# Altium PCB BlinkPico.PcbDoc
Units mm, origin at the board's own origin, x right, y up, seen from the top; angles counter-clockwise.
Board outline 55.91 x 38.26 mm, 4 copper layers (Top Layer, Int1 (GND), Int2 (PWR), Bottom Layer), stack 1.369 mm thick; 9 components, 23 nets, 82 pads, 6 vias.
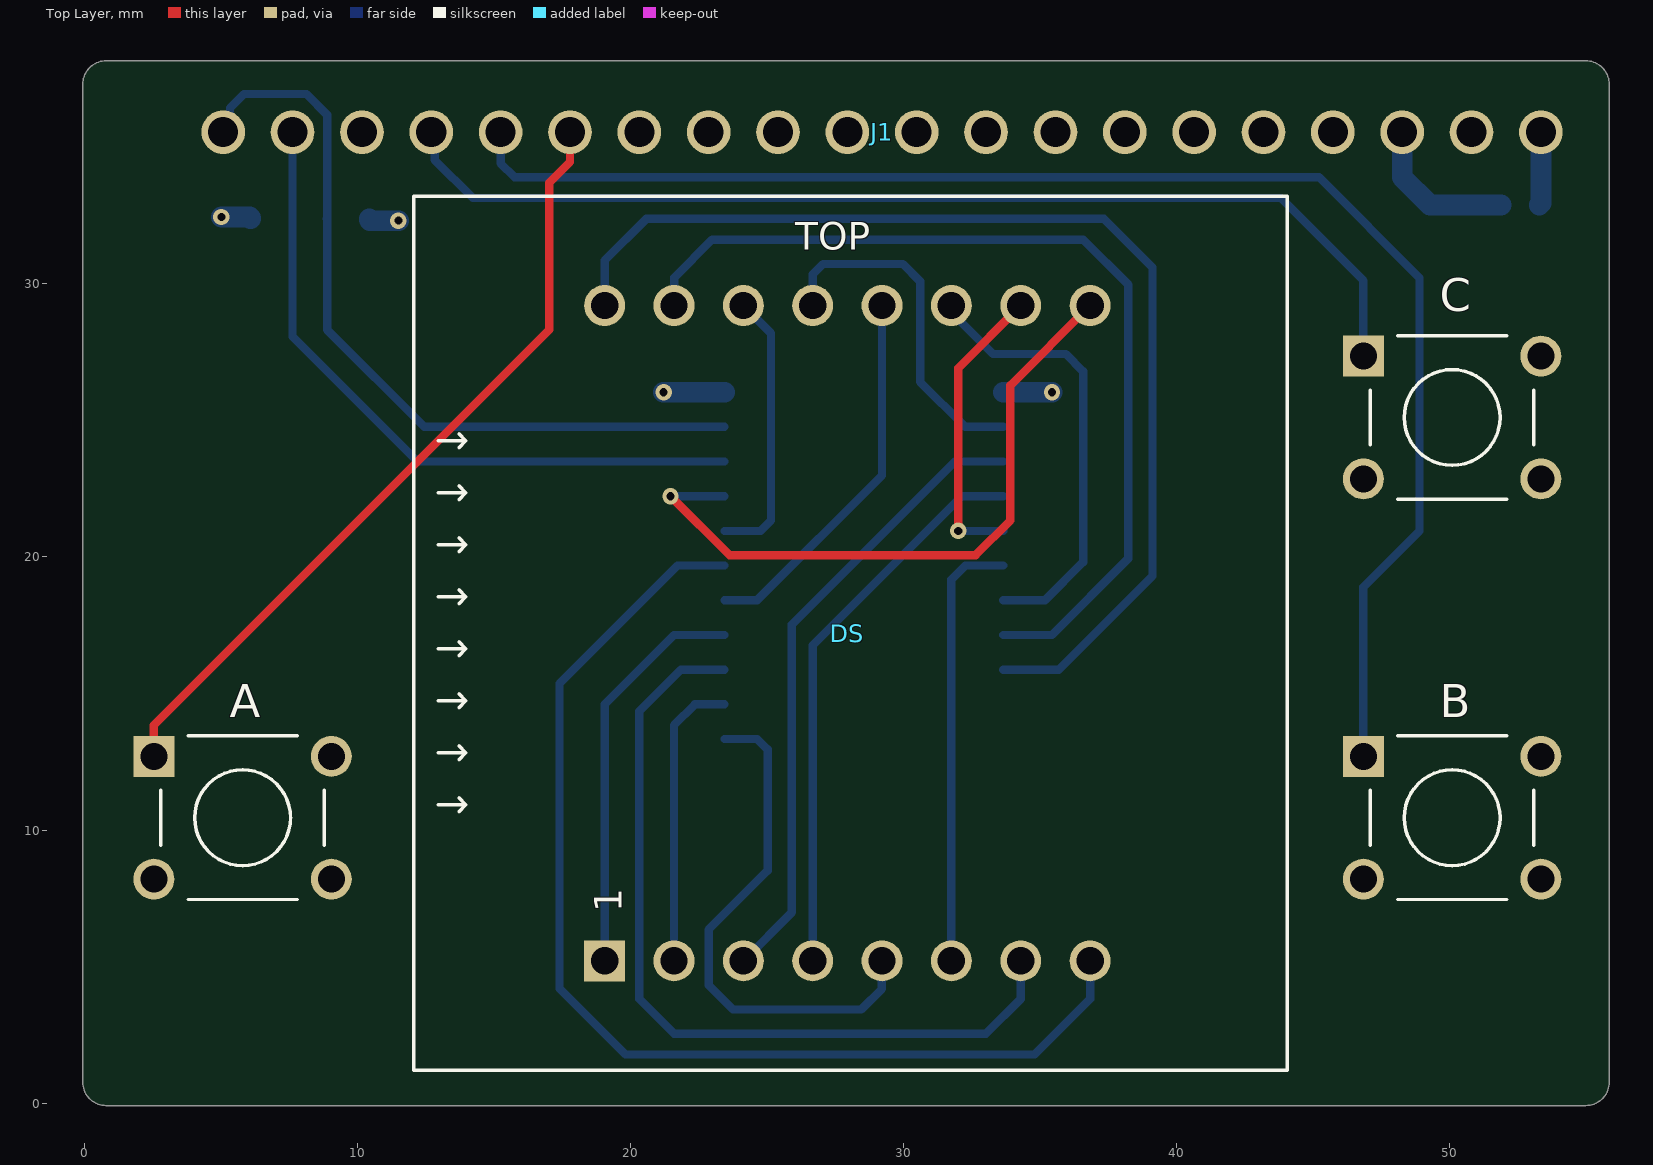
[diagram p0: Top Layer view]
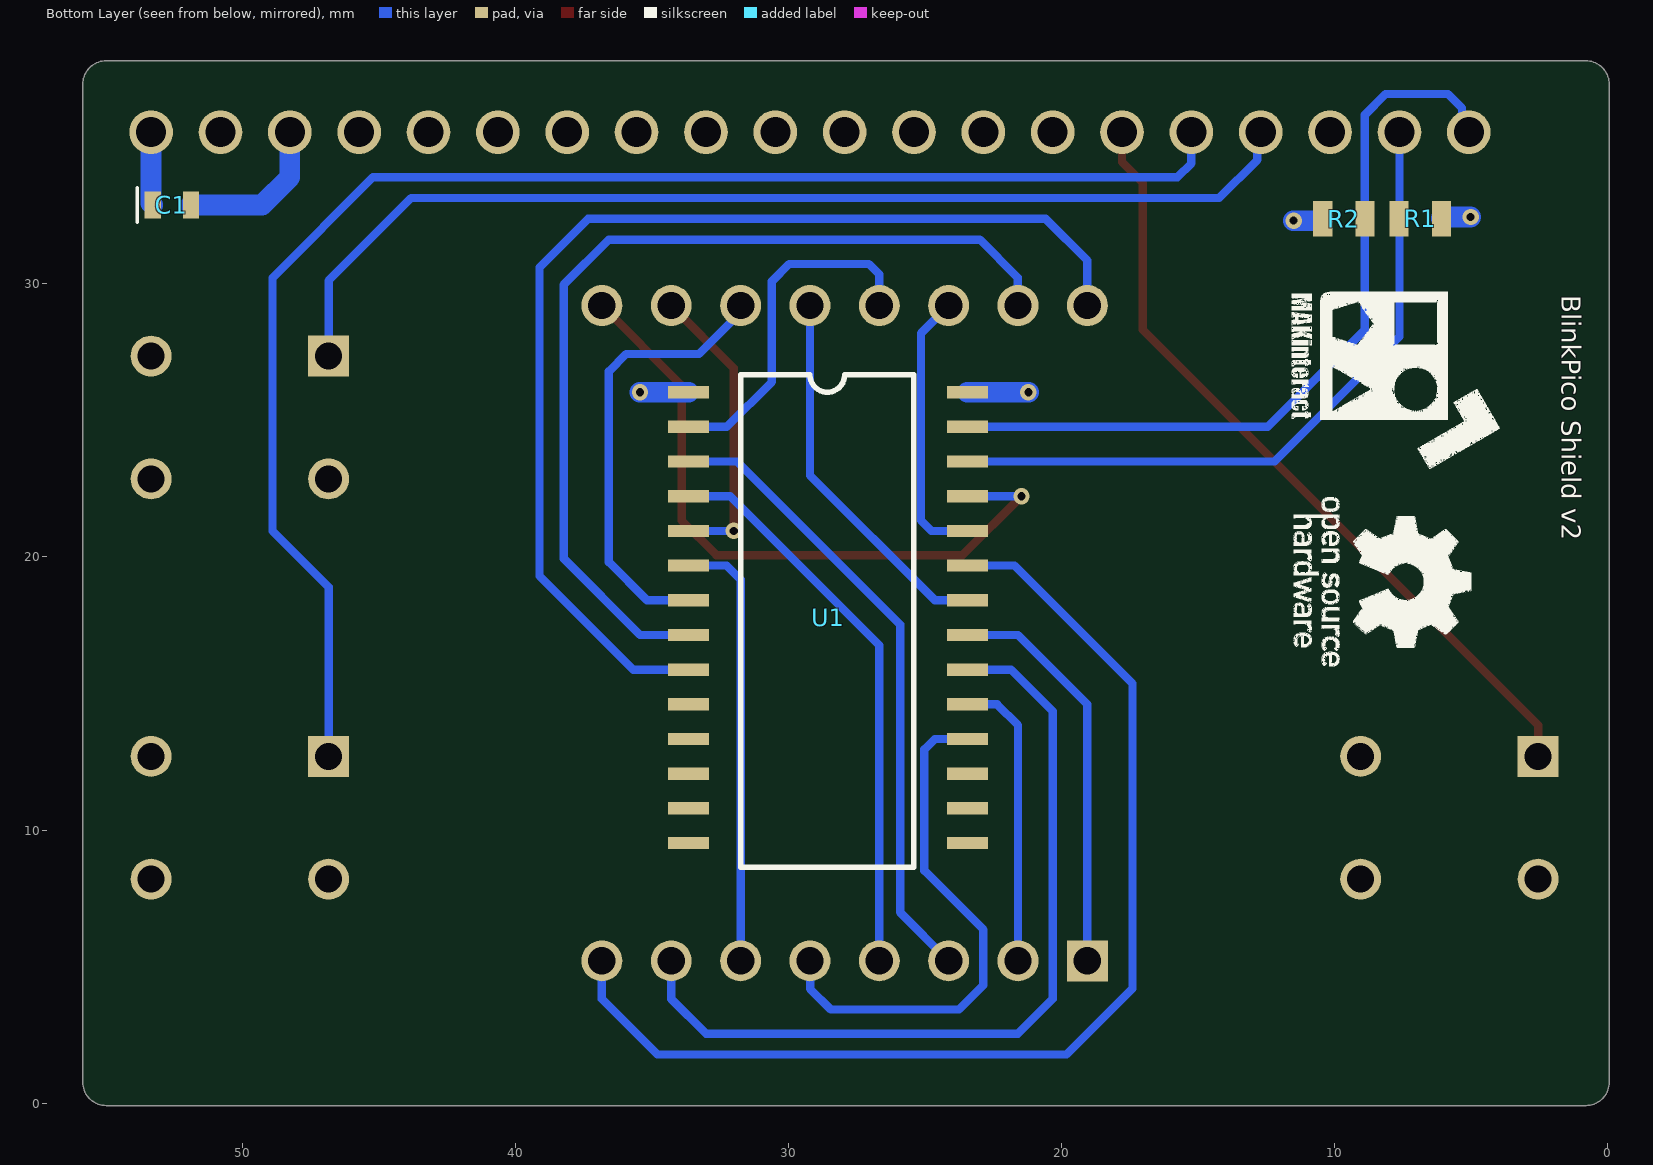
[diagram p1: Bottom Layer view, seen from below]
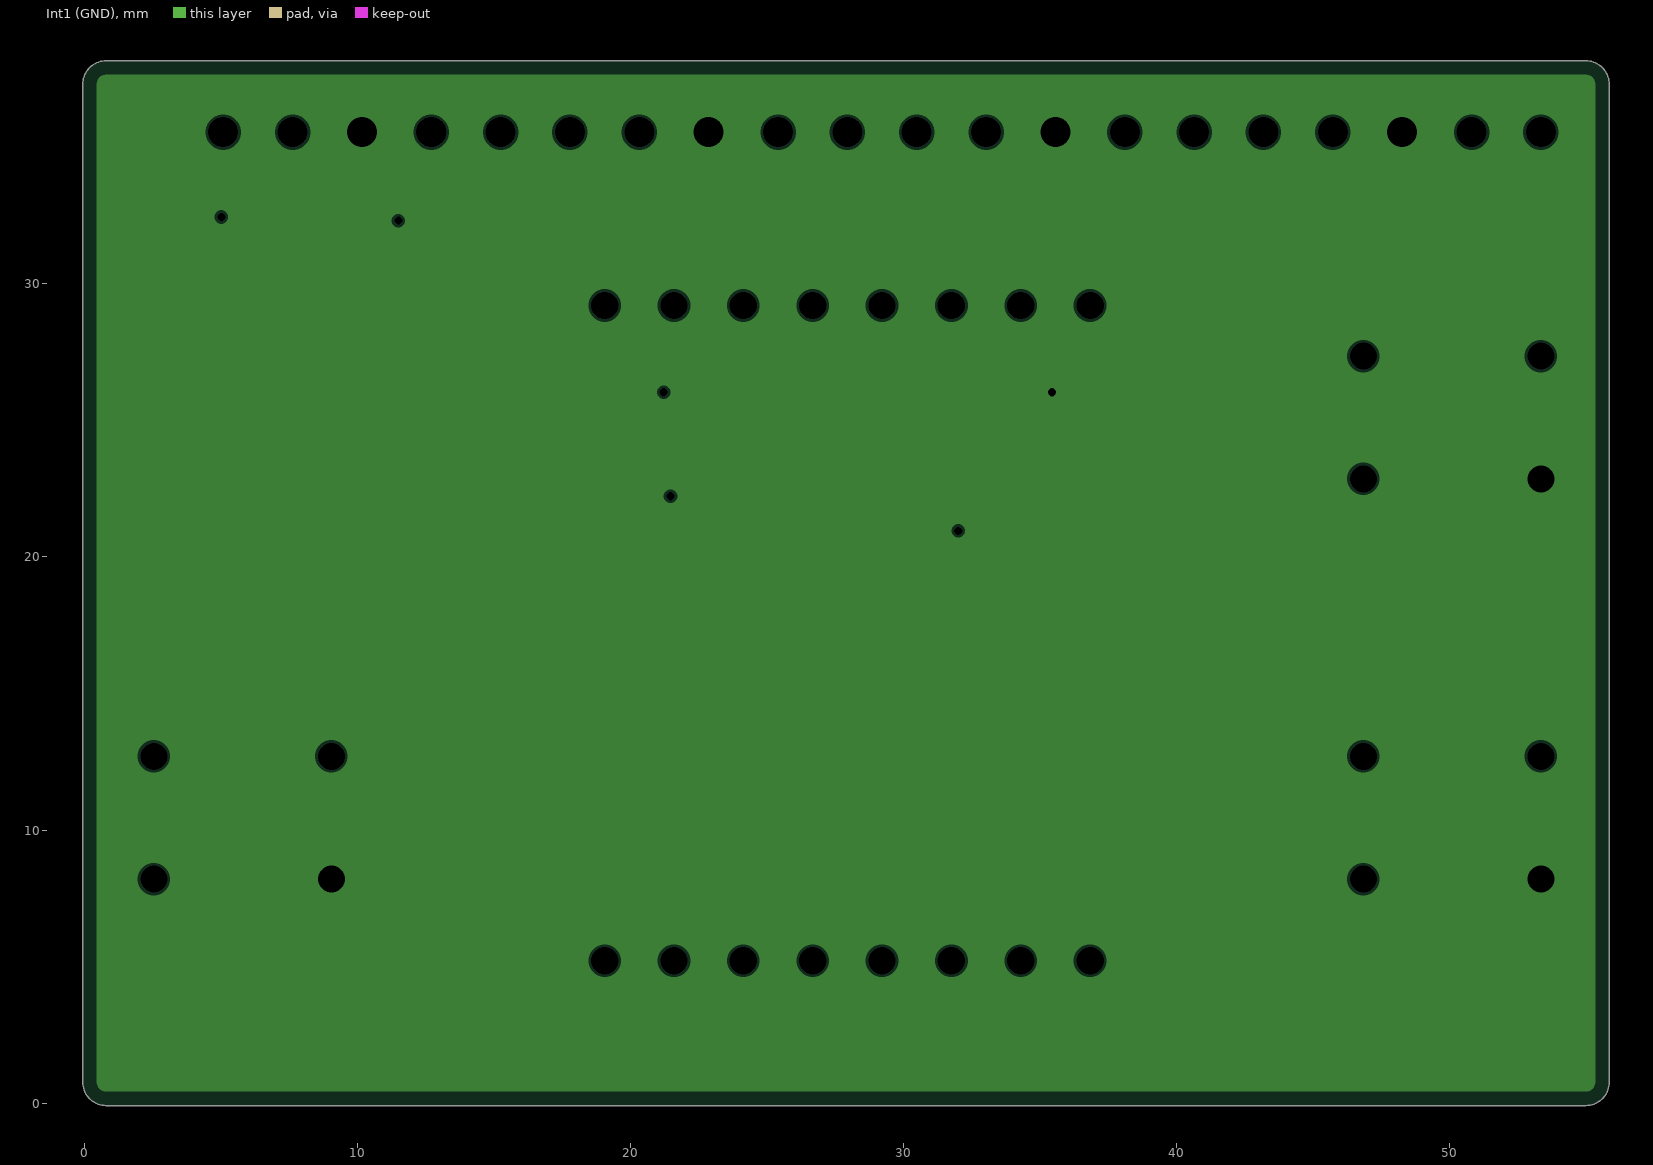
[diagram p2: Int1 (GND), clearances drawn from the general rule]
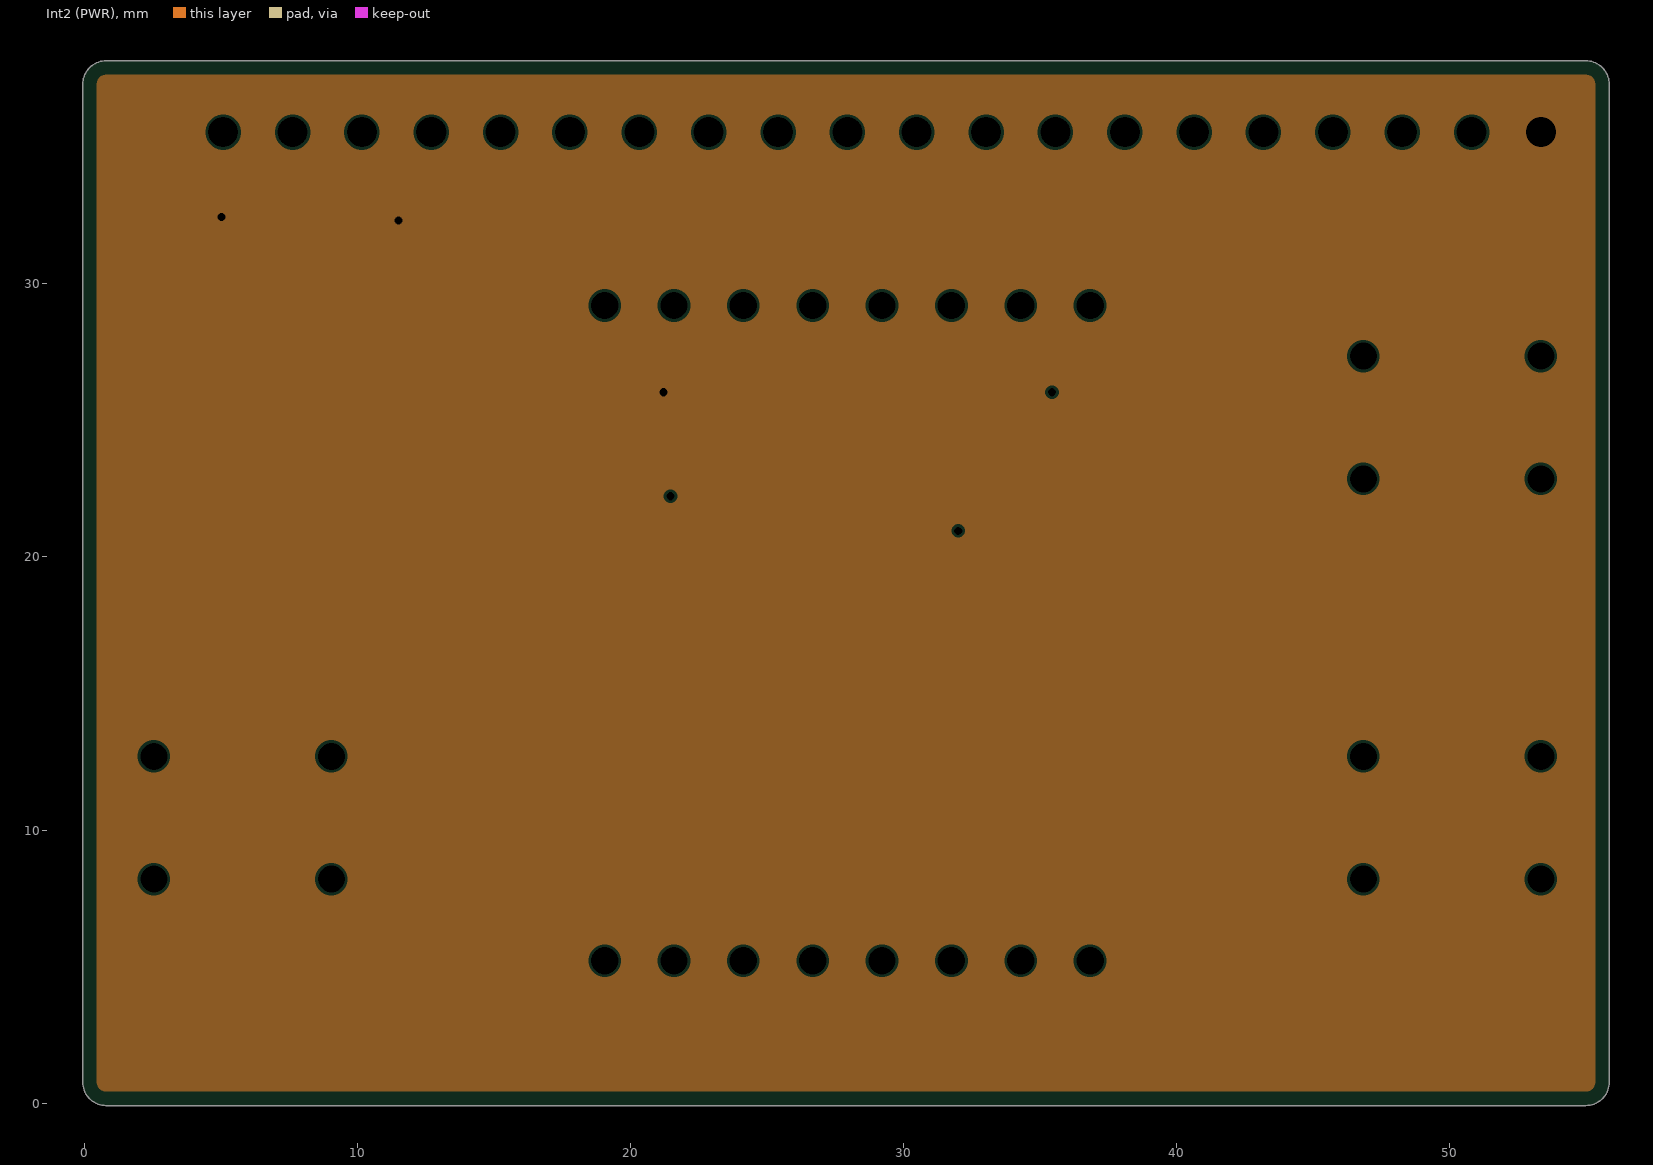
[diagram p3: Int2 (PWR), clearances drawn from the general rule]
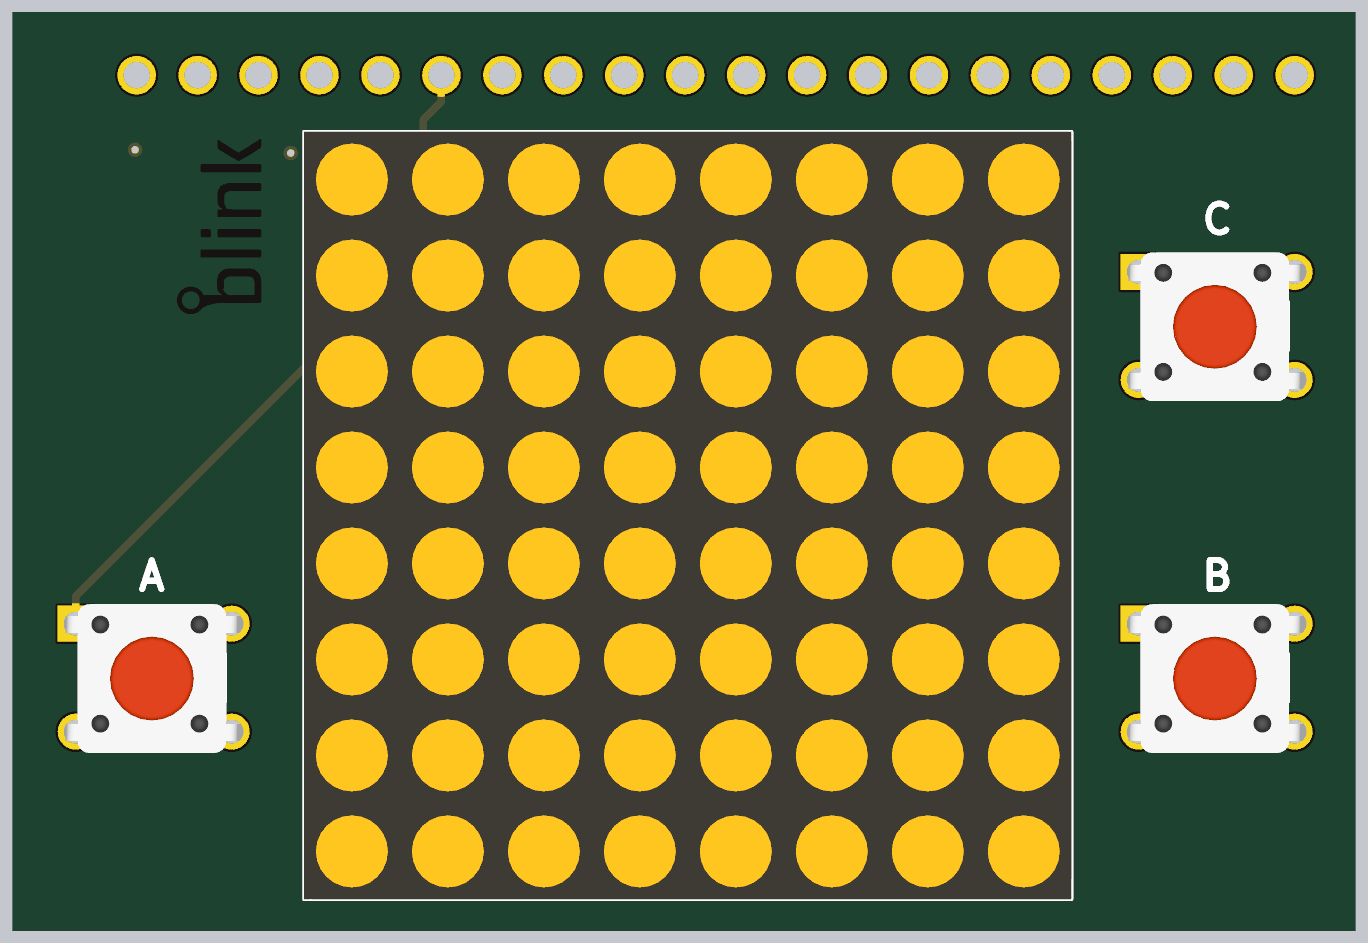
[diagram p4: 3D render of the assembled board from above, using the file's embedded part models]
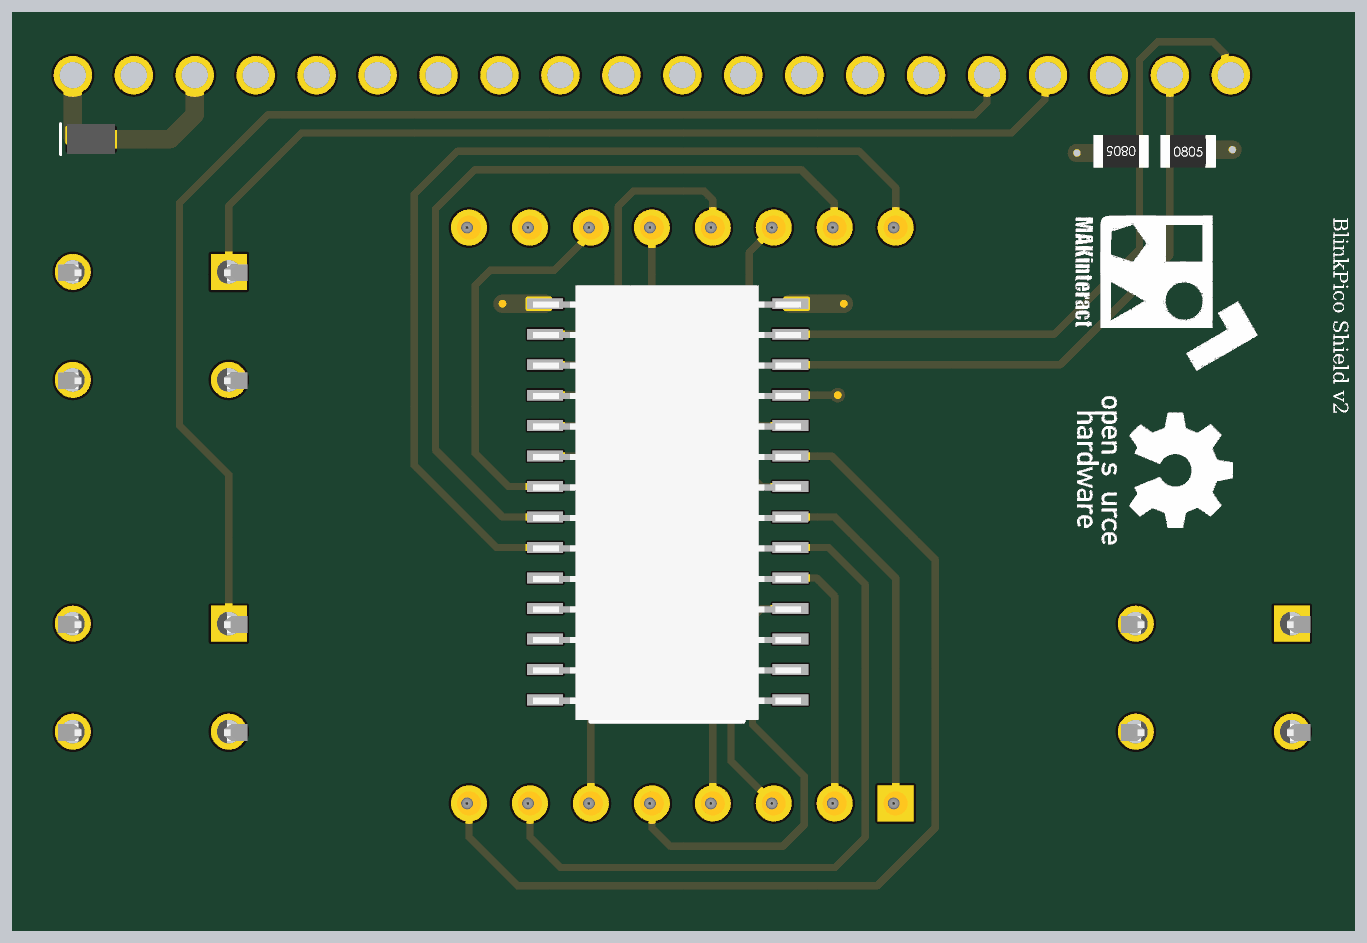
[diagram p5: 3D render of the assembled board from below, using the file's embedded part models]

## Layer stack, top to bottom
Top Solder: solder mask 0.0254, SM-001, Dk 4
Top Layer: signal copper 0.035
Dielectric 1: prepreg 0.1295, PP-017, Dk 4.3
Dielectric 2: prepreg 0.1295, PP-017, Dk 4.3
Int1 (GND): plane copper 0.035, net GND
Dielectric 3: core 0.7112, Core-039, Dk 4.8
Int2 (PWR): plane copper 0.035, net +5
Dielectric 4: prepreg 0.1295, PP-017, Dk 4.3
Dielectric 5: prepreg 0.1295, PP-017, Dk 4.3
Bottom Layer: signal copper 0.035
Bottom Solder: solder mask 0.0254, SM-001, Dk 4

## Board outline
-0.064,0.761 ccw(c0.789,0.762) 0.788,-0.09 ccw(c0.788,0.123) 0.789,-0.09 cw(c0.788,-0.027) 0.788,-0.09 0.789,-0.09 54.991,-0.09 ccw(c54.991,0.762) 55.843,0.761 ccw(c55.788,0.762) 55.843,0.762 55.843,37.321 ccw(c55.779,37.322) 55.843,37.322 ccw(c54.991,37.322) 54.991,38.174 42.8,38.174 ccw(c42.799,38.109) 42.799,38.174 0.789,38.174 cw(c0.789,38.11) 0.789,38.174 ccw(c0.789,37.322) -0.064,37.322 ccw(c0,37.322) -0.064,37.321 -0.064,0.762 ccw(c0,0.762)

## Design rules (kind name [scope] priority, off if disabled: settings)
Clearance "Around polygon" [IsRegion] p1: gap=0.3 ignorepadtopadclearanceinfootprint=FALSE
Clearance [All] p2: gap=0.102 ignorepadtopadclearanceinfootprint=FALSE
ComponentClearance [All] p1: gap=0.2 collisioncheckmode=3 verticalgap=0.2 showdistances=FALSE
HoleSize [All] p1: absolutevalues=TRUE maxlimit=3.5 minlimit=0.2 maxpercent=80.000 minpercent=20.000
HoleToHoleClearance [All] p1: gap=0.305 allowstackedmicrovias=TRUE
MinimumSolderMaskSliver [All] p1: minsoldermaskwidth=0.003
PlaneClearance [All] p1: clearance=0.1
PlaneConnect [All] p1: planeconnectstyle=Direct reliefexpansion=0.508 reliefentries=4 reliefconductorwidth=0.254 reliefairgap=0.254
PolygonConnect [All] p1: connectstyle=Direct reliefconductorwidth=0.254 reliefentries=4 polygonreliefangle="90 Angle" airgapwidth=0.254
RoutingVias [All] p1: holewidth=0.3 width=0.6 viastyle="Through Hole" minholewidth=0.3 minwidth=0.6 maxholewidth=0.3 maxwidth=0.6
SilkToSilkClearance [All] p1: silktosilkclearance=0.1
SilkToSolderMaskClearance [IsPad] p1: minsilkscreentomaskgap=0.1 clearancetoexposedcopper=TRUE
SolderMaskExpansion [All] p1: expansion=0.1 istentingtop=FALSE
UnRoutedNet MountingHoles [(InNet('NetMH1_1') AND InNet('NetMH2_1') AND InNet('NetMH3_1') AND InNet('NetMH4_1'))] p1 off:
UnRoutedNet [All] p2:
Width Width_POWER [InNet ('+*') or InNet('GND')] p1: maxlimit=0.762 minlimit=0.254 preferedwidth=0.305
Width [All] p2: maxlimit=0.305 minlimit=0.102 preferedwidth=0.152
21 further rules are at their usual default settings.

## Components (designator, comment, footprint, x,y, rotation, side; value= is the part's Value field where it differs from the comment)
A "350766-1" PUSH_BTN 2.54,12.7 r0 top (schematic designator B1)
B "350766-1" PUSH_BTN 46.84,12.7 r0 top (schematic designator B2)
C "350766-1" PUSH_BTN 46.84,27.36 r0 top (schematic designator B3)
C1 "TCP1A106M8R" C0805 52.578,32.893 r180 bottom
DS "LDM1088BX" LED_MATRIX_8X8 19.05,5.21 r90 top
J1 "RpiPico" PICO_ADAPTER 53.34,35.56 r0 top
R1 "10K" R0805 6.858,32.385 r180 bottom
R2 "10K" R0805 9.652,32.385 r0 bottom
U1 "HT16K33" SOP28 27.94,17.78 r180 bottom locked

## Footprints (in the part's own frame and the unit in brackets; to place one, negate y for a bottom-side part, rotate by r counter-clockwise, add the part's x,y. Pads: shape width x height; smd on the part's side, far side on the other; paste and mask are expansions set on the pad)
C0805 [mm]
  rect 0.6x1 smd mask+0.07: 1(-0.7,0) 2(0.7,0)
  silkscreen extent -1.27,-0.63 -1.27,0.64, body extent -1,-0.63 1,0.63, height 1.01
LED_MATRIX_8X8 [mm]
  rect 1.5x1.5 hole 1: 1(0,0)
  round 1.5 hole 1: 2(0,-2.54) 3(0,-5.08) 4(0,-7.62) 5(0,-10.16) 6(0,-12.7) 7(0,-15.24) 8(0,-17.78) 9(24,-17.78) 10(24,-15.24) 11(24,-12.7) 12(24,-10.16) 13(24,-7.62) 14(24,-5.08) 15(24,-2.54) 16(24,0)
  silkscreen extent -4,-25 28,7, body extent -4,-25 28,7, height 7.01
PICO_ADAPTER [mm]
  round 1.6 hole 1.1: 1(0,0) 2(-2.54,0) 3(-5.08,0) 4(-7.62,0) 5(-10.16,0) 6(-12.7,0) 7(-15.24,0) 8(-17.78,0) 9(-20.32,0) 10(-22.86,0) 11(-25.4,0) 12(-27.94,0) 13(-30.48,0) 14(-33.02,0) 15(-35.56,0) 16(-38.1,0) 17(-40.64,0) 18(-43.18,0) 19(-45.72,0) 20(-48.26,0)
PUSH_BTN [mm]
  rect 1.498x1.498 hole 0.99: 1(0,0)
  round 1.498 hole 0.99: 2(6.5,0) 3(0,-4.5) 4(6.5,-4.5)
  silkscreen extent 0.26,-5.25 6.24,0.74, body extent -0.77,-5.39 7.13,0.81, height 7
R0805 [mm]
  rect 0.7x1.3 smd mask+0.02: 1(-0.775,0) 2(0.775,0)
  body extent -1.15,-0.67 1.15,0.68, height 0.77
SOP28 [mm]
  rect 1.5x0.45 smd mask+0.07: 1(-5.715,8.255) 2(-5.715,6.985) 3(-5.715,5.715) 4(-5.715,4.445) 5(-5.715,3.175) 6(-5.715,1.905) 7(-5.715,0.635) 8(-5.715,-0.635) 9(-5.715,-1.905) 10(-5.715,-3.175) 11(-5.715,-4.445) 12(-5.715,-5.715) 13(-5.715,-6.985) 14(-5.715,-8.255) 15(4.5,-8.255) 16(4.5,-6.985) 17(4.5,-5.715) 18(4.5,-4.445) 19(4.5,-3.175) 20(4.5,-1.905) 21(4.5,-0.635) 22(4.5,0.635) 23(4.5,1.905) 24(4.5,3.175) 25(4.5,4.445) 26(4.5,5.715) 27(4.5,6.985) 28(4.5,8.255)
  silkscreen extent -3.81,-9.14 2.54,8.89, body extent -6.22,-9.09 4.95,9.02, height 1.63

## Part data
A B C: library part PUSH_BTN, "Connector, Soft Shell; Universal MATE-N-LOK; 3; Plug; Nylon; Natural; 19 A", Color=White, Contact Resistance=3.5MR, Current Rating=19A, Flammability Rating="UL94 V-0", Insulation Resistance=1GR, Manufacturer="TE Connectivity", Max Operating Temperature=221°C, Max Voltage Rating (AC)=600V, Min Operating Temperature=-67°C, Package Quantity=1, Supplier Part Number 1=A14280-ND, Approvals=CSA, ComponentLink1Description=https://datasheet.ciiva.com/30171/eng-cat-124962-0304-371-30171553.pdf?src-supplier=Onlinecomponents.com, ComponentLink1URL=https://datasheet.ciiva.com/30171/eng-cat-124962-0304-371-30171553.pdf?src-supplier=Onlinecomponents.com, ComponentLink2Description=https://datasheet.ciiva.com/11717/0900766b8012272c-11717976.pdf?src-supplier=RSComponents, ComponentLink2URL=https://datasheet.ciiva.com/11717/0900766b8012272c-11717976.pdf?src-supplier=RSComponents, ComponentLink3Description=https://datasheet.ciiva.com/16207/eng-cs-82181-softshell-standard-density-0508-16207256.pdf?src-supplier=Future+Electronics, ComponentLink3URL=https://datasheet.ciiva.com/16207/eng-cs-82181-softshell-standard-density-0508-16207256.pdf?src-supplier=Future+Electronics, ComponentLink4Description=https://datasheet.ciiva.com/19473/495744-19473028.pdf?src-supplier=Jameco, ComponentLink4URL=https://datasheet.ciiva.com/19473/495744-19473028.pdf?src-supplier=Jameco, ComponentLink5Description=https://datasheet.ciiva.com/29266/749745-da-01-en-steckgehaeuse-einreihig-3pol-29266513.pdf?src-supplier=Conrad, ComponentLink5URL=https://datasheet.ciiva.com/29266/749745-da-01-en-steckgehaeuse-einreihig-3pol-29266513.pdf?src-supplier=Conrad, ComponentLink6Description=https://datasheet.ciiva.com/41447/001196492-da-01-en-steckergehaeuse-0-0350766-1-41447693.pdf?src-supplier=Conrad, ComponentLink6URL=https://datasheet.ciiva.com/41447/001196492-da-01-en-steckergehaeuse-0-0350766-1-41447693.pdf?src-supplier=Conrad, ComponentLink7Description=https://datasheet.ciiva.com/758/eng-cd-350766-y3-758580.pdf?src-supplier=Digi-Key, ComponentLink7URL=https://datasheet.ciiva.com/758/eng-cd-350766-y3-758580.pdf?src-supplier=Digi-Key, ComponentLink8Description=https://datasheet.ciiva.com/15178/getdatasheetpartid-85356-15178476.pdf?src-supplier=Verical, ComponentLink8URL=https://datasheet.ciiva.com/15178/getdatasheetpartid-85356-15178476.pdf?src-supplier=Verical, ComponentLink9Description=https://datasheet.ciiva.com/25907/eng-cs-82181-softshell-standard-density-0508-25907982.pdf?src-supplier=Avnet+Europe, ComponentLink9URL=https://datasheet.ciiva.com/25907/eng-cs-82181-softshell-standard-density-0508-25907982.pdf?src-supplier=Avnet+Europe, ComponentLink10Description=https://datasheet.ciiva.com/8002/1492314-8002440.pdf?src-supplier=Element14, ComponentLink10URL=https://datasheet.ciiva.com/8002/1492314-8002440.pdf?src-supplier=Element14, ComponentLink11Description=https://datasheet.octopart.com/350766-1-TE-Connectivity-datasheet-11077730.pdf?src-supplier=TE+Connectivity, ComponentLink11URL=https://datasheet.octopart.com/350766-1-TE-Connectivity-datasheet-11077730.pdf?src-supplier=TE+Connectivity, ComponentLink12Description=https://sigma.octopart.com/13728446/technical_drawing/TE-Connectivity-350766-1.pdf?src-supplier=TE+Connectivity, ComponentLink12URL=https://sigma.octopart.com/13728446/technical_drawing/TE-Connectivity-350766-1.pdf?src-supplier=TE+Connectivity, ComponentLink13Description=https://sigma.octopart.com/13532795/instruction_sheet/TE-Connectivity-350766-1.pdf?src-supplier=TE+Connectivity, ComponentLink13URL=https://sigma.octopart.com/13532795/instruction_sheet/TE-Connectivity-350766-1.pdf?src-supplier=TE+Connectivity, ComponentLink14Description=https://sigma.octopart.com/14655065/instruction_sheet/TE-Connectivity-350766-1.pdf?src-supplier=TE+Connectivity, ComponentLink14URL=https://sigma.octopart.com/14655065/instruction_sheet/TE-Connectivity-350766-1.pdf?src-supplier=TE+Connectivity, ComponentLink15Description=https://sigma.octopart.com/55598913/instruction_sheet/TE-Connectivity-350766-1.pdf?src-supplier=TE+Connectivity, ComponentLink15URL=https://sigma.octopart.com/55598913/instruction_sheet/TE-Connectivity-350766-1.pdf?src-supplier=TE+Connectivity, ComponentLink16Description=https://sigma.octopart.com/100063074/technical_drawing/TE-Connectivity-350766-1.pdf?src-supplier=TE+Connectivity, ComponentLink16URL=https://sigma.octopart.com/100063074/technical_drawing/TE-Connectivity-350766-1.pdf?src-supplier=TE+Connectivity, ComponentLink17Description=https://datasheet.octopart.com/350766-1-Agastat-datasheet-13523607.pdf?src-supplier=TE+Connectivity, ComponentLink17URL=https://datasheet.octopart.com/350766-1-Agastat-datasheet-13523607.pdf?src-supplier=TE+Connectivity, ComponentLink18Description=https://datasheet.octopart.com/350766-1-TE-Connectivity-datasheet-93676928.pdf?src-supplier=Master+Electronics, ComponentLink18URL=https://datasheet.octopart.com/350766-1-TE-Connectivity-datasheet-93676928.pdf?src-supplier=Master+Electronics, ComponentLink19Description=https://datasheet.octopart.com/350766-1-TE-Connectivity-datasheet-136661981.pdf?src-supplier=Jameco, ComponentLink19URL=https://datasheet.octopart.com/350766-1-TE-Connectivity-datasheet-136661981.pdf?src-supplier=Jameco, ComponentLink20Description=https://datasheet.octopart.com/350766-1-TE-Connectivity-datasheet-7610435.pdf?src-supplier=Jameco, ComponentLink20URL=https://datasheet.octopart.com/350766-1-TE-Connectivity-datasheet-7610435.pdf?src-supplier=Jameco, ComponentLink21Description=https://sigma.octopart.com/147322513/technical_drawing/TE-Connectivity-350766-1.pdf?src-supplier=Sager+Electronics, ComponentLink21URL=https://sigma.octopart.com/147322513/technical_drawing/TE-Connectivity-350766-1.pdf?src-supplier=Sager+Electronics, ComponentLink22Description=https://sigma.octopart.com/137343799/technical_drawing/TE-Connectivity-350766-1.pdf?src-supplier=Sager+Electronics, ComponentLink22URL=https://sigma.octopart.com/137343799/technical_drawing/TE-Connectivity-350766-1.pdf?src-supplier=Sager+Electronics, ComponentLink23Description=https://datasheet.octopart.com/350766-1-TE-Connectivity-datasheet-575922.pdf?src-supplier=TME, ComponentLink23URL=https://datasheet.octopart.com/350766-1-TE-Connectivity-datasheet-575922.pdf?src-supplier=TME, ComponentLink24Description=https://datasheet.octopart.com/350766-1-TE-Connectivity-datasheet-62135508.pdf?src-supplier=TME, ComponentLink24URL=https://datasheet.octopart.com/350766-1-TE-Connectivity-datasheet-62135508.pdf?src-supplier=TME, ComponentLink25Description=https://datasheet.octopart.com/350766-1-TE-Connectivity-datasheet-20739004.pdf?src-supplier=Allied+Electronics, ComponentLink25URL=https://datasheet.octopart.com/350766-1-TE-Connectivity-datasheet-20739004.pdf?src-supplier=Allied+Electronics, ComponentLink26Description=https://datasheet.octopart.com/350766-1-Tyco-Electronics-datasheet-75719.pdf?src-supplier=Allied+Electronics, ComponentLink26URL=https://datasheet.octopart.com/350766-1-Tyco-Electronics-datasheet-75719.pdf?src-supplier=Allied+Electronics, ComponentLink27Description=https://datasheet.octopart.com/350766-1-Tyco-Electronics-datasheet-9747055.pdf?src-supplier=Allied+Electronics, ComponentLink27URL=https://datasheet.octopart.com/350766-1-Tyco-Electronics-datasheet-9747055.pdf?src-supplier=Allied+Electronics, ComponentLink28Description=https://datasheet.octopart.com/350766-1-Tyco-Electronics-datasheet-504958.pdf?src-supplier=Farnell, ComponentLink28URL=https://datasheet.octopart.com/350766-1-Tyco-Electronics-datasheet-504958.pdf?src-supplier=Farnell, ComponentLink29Description=https://datasheet.octopart.com/350766-1-Tyco-Electronics-datasheet-5317283.pdf?src-supplier=Farnell, ComponentLink29URL=https://datasheet.octopart.com/350766-1-Tyco-Electronics-datasheet-5317283.pdf?src-supplier=Farnell, ComponentLink30Description=https://datasheet.octopart.com/350766-1-Agastat-datasheet-14718520.pdf?src-supplier=Farnell, ComponentLink30URL=https://datasheet.octopart.com/350766-1-Agastat-datasheet-14718520.pdf?src-supplier=Farnell, ComponentLink31Description=https://datasheet.octopart.com/350766-1-Tyco-Electronics-datasheet-657038.pdf?src-supplier=Future+Electronics, ComponentLink31URL=https://datasheet.octopart.com/350766-1-Tyco-Electronics-datasheet-657038.pdf?src-supplier=Future+Electronics, ComponentLink32Description=https://datasheet.octopart.com/350766-1-TE-Connectivity---AMP-datasheet-5333557.pdf?src-supplier=Electro+Sonic, ComponentLink32URL=https://datasheet.octopart.com/350766-1-TE-Connectivity---AMP-datasheet-5333557.pdf?src-supplier=Electro+Sonic, ComponentLink33Description=https://sigma.octopart.com/141437736/technical_drawing/TE-Connectivity---AMP-350766-1.pdf?src-supplier=Upverter, ComponentLink33URL=https://sigma.octopart.com/141437736/technical_drawing/TE-Connectivity---AMP-350766-1.pdf?src-supplier=Upverter, Connector System=Wire-to-Wire, Connector Type=Plug, Contact Gender=Male, Contact Material=Bronze, Contact Plating=Tin, Contact Retention="No (Without)", Contact Type="Male or Female", Depth=27.43mm, ELV=Compliant, Fastening Type=Latch, Gender=Male, Height=14.73mm, Housing Color=White, Housing Material=Nylon, Insulation Material=Nylon, Lead Free="Lead Free", Manufacturer Part Number=350766-1, Material=Nylon, Max Current Rating=19A, Mount="Free Hanging", Number of Circuits=3, Number of Contacts=3, Number of Pins=3, Number of Positions=3, Number of Rows=1, Orientation=Straight, Packaging=Bulk, Pitch=6.35mm, Pricing 1="1 = 0.55000, 10 = 0.47900, 25 = 0.43840, 50 = 0.41240, 100 = 0.39530, 250 = 0.36088, 500 = 0.34370, 1000 = 0.28356, 2500 = 0.25778 (USD)", REACH SVHC="No SVHC", Sealable="No (Without)", Series="Universal MATE-N-LOK", Stock 1=60989, Supplier 1=Digi-Key, Termination=Crimp, VDE Tested=Yes, Voltage Rating=600V, Width=14.73mm, Wire Gauge (Max)=30AWG, Wire Gauge (Min)=10AWG, Wire/Cable Gauge=30AWG
C1: library part C0805_10U_TANTAL, "Cap Tant Solid 10uF 10V P CASE 20% (2 X 1.25 X 1.2mm) Inward L SMD 2012-12 125C T/R", Capacitance=10uF, Case Code (Imperial)=0805, Case Code (Metric)=2012, Manufacturer=Rohm, Max Operating Temperature=125°C, Min Operating Temperature=-55°C, Package Quantity=3000, Supplier Part Number 1=511-1685-1-ND, Tolerance=20%, Voltage Rating=10V, Case/Package=0805, Category="Tantalum Capacitors", ComponentLink1Description=https://datasheet.ciiva.com/16493/tc-p-16493678.pdf?src-supplier=Future+Electronics, ComponentLink1URL=https://datasheet.ciiva.com/16493/tc-p-16493678.pdf?src-supplier=Future+Electronics, Construction=Flat, Depth=1.25mm, Features="General Purpose", Height - Seated (Max)=0.047inch, Lead Free="Lead Free", Length=0.079inch, Manufacturer Part Number=TCP1A106M8R, Mount="Surface Mount", Packaging="Tape and Reel", Pricing 1="1=0.61000, 10=0.43400, 50=0.32800, 100=0.28570, 500=0.21160, 1000=0.17986 (USD)", Radiation Hardening=No, RoHS=Yes, RoHS Compliant=Yes, Series=TC, Stock 1=13672, Supplier 1=Digi-Key, Width=0.049inch
DS: library part LED_MATRIX, "DISPLAY, DOT MATRIX, 0.8, 8X8, GREEN; Display Dots x Lines: 8 x 8; LED Colour: Red", Package="DIP-16 Kingbright", Availability=Unavailable, ComponentLink1Description=Devicemart, ComponentLink1URL=https://www.devicemart.co.kr/goods/view?no=1287093, MF=Kingbright, MP=TA08-81GWA, Price=None, SnapEDA_Link=https://www.snapeda.com/parts/TA08-81GWA/Kingbright/view-part/553394/?ref=snap
J1: library part PICO_ADAPTER
R1 R2: library part R0805_10K, "Res Thick Film 0805 10K Ohm 5% 1/8W ±100ppm/°C Molded SMD Paper T/R", Case Code (Imperial)=0805, Case Code (Metric)=2012, Manufacturer=Yageo, Manufacturer Part Number=RC0805JR-0710KL, Max Operating Temperature=155°C, Max Power Dissipation=125mW, Min Operating Temperature=-55°C, Resistance=10kR, Resistance Tolerance=5%, Resistor Type="Thick Film", Supplier Part Number 1=311-10KARCT-ND, Temperature Coefficient=100ppm/°C, Voltage Rating=150V, Case/Package=0805, Category="Chip SMD Resistors", ComponentLink1Description=https://datasheet.ciiva.com/7941/444164-7941870.pdf?src-supplier=Element14, ComponentLink1URL=https://datasheet.ciiva.com/7941/444164-7941870.pdf?src-supplier=Element14, ComponentLink2Description=https://datasheet.ciiva.com/7941/444164-7941871.pdf?src-supplier=Element14, ComponentLink2URL=https://datasheet.ciiva.com/7941/444164-7941871.pdf?src-supplier=Element14, ComponentLink3Description=https://datasheet.ciiva.com/7983/444164-7983765.pdf?src-supplier=Element14, ComponentLink3URL=https://datasheet.ciiva.com/7983/444164-7983765.pdf?src-supplier=Element14, Construction=Rectangular, Contact Plating=Tin,Matte, Depth=1.25mm, Features="Moisture Resistant", Height=0.5mm, Lead Free="Lead Free", Length=2mm, Military Standard=Not, Number of Terminations=2, Packaging="Tape and Reel", Power Rating=125mW, Pricing 1="1=0.10000, 10=0.03600, 100=0.01450, 1000=0.00652, 2500=0.00566 (USD)", Radiation Hardening=No, REACH SVHC=Unknown, RoHS=Yes, RoHS Compliant=Yes, Series=RC, Size Code=0805, Stock 1=1237768, Supplier 1=Digi-Key, Termination=SMD/SMT, Tolerance=5%, Width=1.25mm

## Via types
v1: diameter 0.6, hole 0.3, Top Layer to Bottom Layer, tented both sides, 6 vias

## Nets (pads, with @x,y where several pads share a name; then routed paths per layer and width w, separated by ;. In a path a pad name is that pad's centre, name@x,y a point inside that pad or via, vN(x,y) a via of type N, cw(c..) or ccw(c..) an arc to the next point about the centre after c; other vN are vias at no path point)
+5: C1.1 J1.1 R1.2 R2.2 U1.28 | length 7.2
  Bottom Layer w0.762: v1(5.013,32.452) 6.052,32.452 6.083,32.421 R1.2 ; R2.2 10.427,32.349 10.458,32.318 v1(11.497,32.318) ; v1(21.209,26.035) U1.28 ; C1.1 53.34,32.955 J1.1
BTNA: A.1 J1.15 | length 29.2
  Top Layer w0.305: A.1 2.54,13.843 17.018,28.321 17.018,33.702 17.78,34.464 J1.15
BTNB: B.1 J1.16 | length 54.9
  Bottom Layer w0.305: J1.16 15.24,34.417 15.748,33.909 45.212,33.909 48.895,30.226 48.895,20.955 46.84,18.9 B.1
BTNC: C.1 J1.17 | length 39.7
  Bottom Layer w0.305: J1.17 12.827,35.433 12.827,34.544 14.224,33.147 43.815,33.147 46.84,30.122 C.1
COM0: DS.13 U1.2 | length 12.9
  Bottom Layer w0.305: DS.13 26.67,30.353 27.051,30.734 29.972,30.734 30.607,30.099 30.607,26.416 32.258,24.765 U1.2
COM1: DS.3 U1.3 | length 23.3
  Bottom Layer w0.305: DS.3 25.908,6.988 25.908,17.526 31.877,23.495 U1.3
COM2: DS.4 U1.4 | length 20.8
  Bottom Layer w0.305: DS.4 26.67,16.764 32.132,22.226 32.384,22.226 ; 32.385,22.225 U1.4
COM3: DS.10 U1.5 | length 10.9
  Top Layer w0.305: v1(32.004,20.955) 32.004,26.924 DS.10
  Bottom Layer w0.305: v1(32.004,20.955) U1.5
COM4: DS.6 U1.6 | length 16.1
  Bottom Layer w0.305: DS.6 31.75,19.177 32.258,19.685 U1.6
COM5: DS.11 U1.7 | length 16.5
  Bottom Layer w0.305: DS.11 31.75,28.956 33.274,27.432 35.941,27.432 36.576,26.797 36.576,19.812 35.179,18.415 U1.7
COM6: DS.15 U1.8 | length 34.7
  Bottom Layer w0.305: DS.15 21.603,29.223 21.603,30.239 22.987,31.623 36.576,31.623 38.227,29.972 38.227,19.939 35.433,17.145 U1.8
COM7: DS.16 U1.9 | length 41.3
  Bottom Layer w0.305: DS.16 19.05,30.861 20.574,32.385 37.338,32.385 39.116,30.607 39.116,19.304 35.687,15.875 U1.9
GND: A.4 B.4 C1.2 C.4 J1.3 J1.8 J1.13 J1.18 U1.1 | length 7.5
  Bottom Layer w0.762: U1.1 v1(35.433,26.035) ; J1.3 48.26,33.909 49.276,32.893 C1.2
NetDS_1: DS.1 U1.21 | length 14.8
  Bottom Layer w0.305: DS.1 19.05,14.605 21.591,17.146 21.843,17.146 ; 21.844,17.145 U1.21
NetDS_2: DS.2 U1.19 | length 10.8
  Bottom Layer w0.305: DS.2 21.59,13.843 22.352,14.605 U1.19
NetDS_5: DS.5 U1.18 | length 19.3
  Bottom Layer w0.305: U1.18 24.638,13.335 25.019,12.954 25.019,8.509 22.86,6.35 22.86,4.318 23.749,3.429 28.448,3.429 29.2,4.181 29.2,5.2 DS.5
NetDS_7: DS.7 U1.20 | length 30.7
  Bottom Layer w0.305: U1.20 21.844,15.875 20.32,14.351 20.32,3.81 21.59,2.54 33.02,2.54 34.29,3.81 DS.7
NetDS_8: DS.8 U1.23 | length 41.7
  Bottom Layer w0.305: U1.23 21.717,19.685 17.399,15.367 17.399,4.191 19.812,1.778 34.798,1.778 36.83,3.81 DS.8
NetDS_9: DS.9 U1.25 | length 24.9
  Top Layer w0.305: v1(21.463,22.225) 23.622,20.066 32.639,20.066 33.909,21.336 33.909,26.289 DS.9
  Bottom Layer w0.305: v1(21.463,22.225) U1.25
NetDS_12: DS.12 U1.22 | length 13.9
  Bottom Layer w0.305: U1.22 24.638,18.415 29.21,22.987 DS.12
NetDS_14: DS.14 U1.24 | length 10.2
  Bottom Layer w0.305: U1.24 24.765,20.955 25.146,21.336 25.146,28.194 DS.14
SCL: J1.19 R1.1 U1.26 | length 25.2
  Bottom Layer w0.305: 7.619,28.068 12.192,23.495 U1.26 ; 7.62,28.068 J1.19
SDA: J1.20 R2.1 U1.27 | length 29
  Bottom Layer w0.305: J1.20 5.328,35.808 5.328,36.443 5.842,36.957 8.128,36.957 8.89,36.195 8.89,32.398 R2.1 8.89,32.372 8.89,28.321 12.446,24.765 U1.27
pads on no net: A.2 A.3 B.2 B.3 C.2 C.3 J1.2 J1.4 J1.5 J1.6 J1.7 J1.9 J1.10 J1.11 J1.12 J1.14 U1.10 U1.11 U1.12 U1.13 U1.14 U1.15 U1.16 U1.17

## Polygon pours and split planes (outlines as drawn)
GND on Int1 (GND) (split plane): 0.789,37.664
GND on Int1 (GND) (split plane): 55.333,0.762 55.333,0.761 55.333,0.762
GND on Int1 (GND) (split plane): 0.789,37.664 0.788,37.664
GND on Int1 (GND) (split plane): 55.058,37.659 55.122,37.639 55.182,37.607 55.234,37.565 55.277,37.513 55.308,37.453 55.328,37.389 55.334,37.33 55.334,37.327 55.333,37.322 55.333,37.321 55.333,0.768 55.298,0.769 55.295,0.762 55.296,0.761 55.333,0.761 55.334,0.754 55.328,0.695 55.308,0.631 55.277,0.571 55.234,0.519 55.182,0.476 55.122,0.445 55.058,0.425 54.999,0.419 54.991,0.42 0.791,0.42 0.792,0.455 0.788,0.457 0.785,0.456 0.785,0.42 0.788,0.42 0.789,0.42 0.788,0.42 0.785,0.42 0.78,0.419 0.722,0.425 0.657,0.445 0.598,0.476 0.546,0.519 0.503,0.571 0.471,0.631 0.452,0.695 0.446,0.754 0.447,0.761 0.447,0.762 0.483,0.762 0.481,0.768 0.447,0.768 0.447,37.321 0.447,37.322 0.446,37.326 0.447,37.322 0.483,37.322 0.482,37.326 0.446,37.326 0.446,37.33 0.452,37.389 0.471,37.453 0.503,37.513 0.546,37.565 0.598,37.607 0.657,37.639 0.722,37.659 0.78,37.664 0.786,37.664 0.787,37.664 0.787,37.628 0.789,37.627 0.791,37.628 0.791,37.664 42.795,37.664 42.795,37.629 42.799,37.627 42.799,37.664 42.8,37.664 54.991,37.664 54.999,37.665
+5 on Int2 (PWR) (split plane): 0.789,37.664
+5 on Int2 (PWR) (split plane): 55.333,0.762 55.333,0.761 55.333,0.762
+5 on Int2 (PWR) (split plane): 0.789,37.664 0.788,37.664
+5 on Int2 (PWR) (split plane): 55.058,37.659 55.122,37.639 55.182,37.607 55.234,37.565 55.277,37.513 55.308,37.453 55.328,37.389 55.334,37.33 55.334,37.327 55.333,37.322 55.333,37.321 55.333,0.768 55.298,0.769 55.295,0.762 55.296,0.761 55.333,0.761 55.334,0.754 55.328,0.695 55.308,0.631 55.277,0.571 55.234,0.519 55.182,0.476 55.122,0.445 55.058,0.425 54.999,0.419 54.991,0.42 0.791,0.42 0.792,0.455 0.788,0.457 0.785,0.456 0.785,0.42 0.788,0.42 0.789,0.42 0.788,0.42 0.785,0.42 0.78,0.419 0.722,0.425 0.657,0.445 0.598,0.476 0.546,0.519 0.503,0.571 0.471,0.631 0.452,0.695 0.446,0.754 0.447,0.761 0.447,0.762 0.483,0.762 0.481,0.768 0.447,0.768 0.447,37.321 0.447,37.322 0.446,37.326 0.447,37.322 0.483,37.322 0.482,37.326 0.446,37.326 0.446,37.33 0.452,37.389 0.471,37.453 0.503,37.513 0.546,37.565 0.598,37.607 0.657,37.639 0.722,37.659 0.78,37.664 0.786,37.664 0.787,37.664 0.787,37.628 0.789,37.627 0.791,37.628 0.791,37.664 42.795,37.664 42.795,37.629 42.799,37.627 42.799,37.664 42.8,37.664 54.991,37.664 54.999,37.665

## Silkscreen, mask and mechanical layers (free items; w line width, h text height)
Bottom Overlay:
  drawing of 32 lines, arcs and shapes, not listed
  text "BlinkPico Shield v2" at 1.905,29.591 h1.2 r90
Top Solder:
  drawing of 7 lines, arcs and shapes, not listed
Cutout:
  lines w0.127: 42.658,38.11 54.991,38.11 cw(c54.991,37.322) 55.78,37.322 55.78,0.762 cw(c54.991,0.762) 54.991,-0.027 0.789,-0.027 cw(c0.789,0.762) 0,0.762 0,37.322 cw(c0.789,37.322) 0.789,38.11 42.799,38.11

## Text inside footprints (layer, text, board x,y; h text height)
DS: Top Overlay "1" at 19.685,6.988 h1 r90; Top Overlay "TOP" at 26.035,31.245 h1
J1: Mechanical 15 "Rpi Pico Right Edge" at 21.333,38.1 h1